# Altium PCB AT89S52单片机入门与提高_粗.PcbDoc (part 5 of 5)
Units mm, origin at the board's own origin, x right, y up, seen from the top; angles counter-clockwise.
Board outline 152.4 x 101.6 mm, 2 copper layers (Top Layer, Bottom Layer); 111 components, 112 nets, 451 pads, 42 vias.
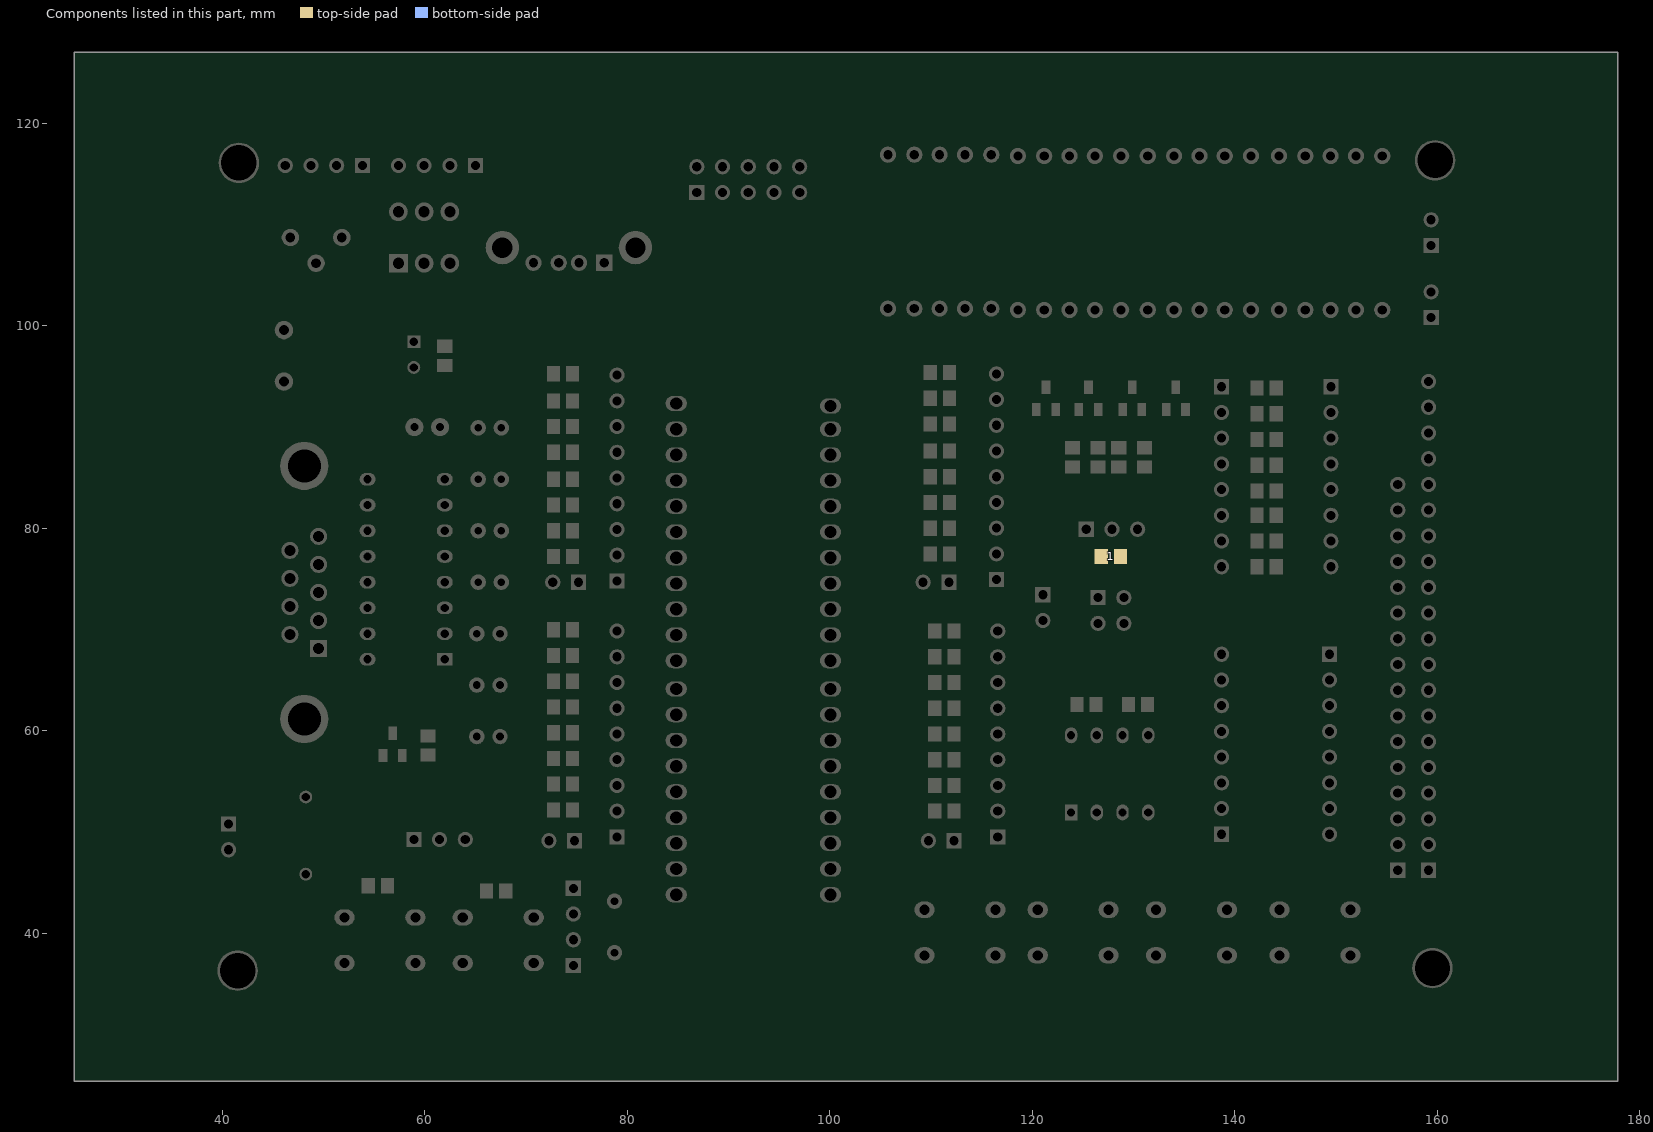
[diagram p5: the components of this part, seen from the top]

## Silkscreen, mask and mechanical layers (free items; w line width, h text height)
Top Overlay:
  text "S52/AVR" at 88.646,103.759 h1.02
  text "20" at 162.052,93.599 h1.02 r90
  text "GND" at 40.386,91.694 h1.02 r90
  text "DATE" at 126.111,81.534 h1.02
  text "15" at 162.052,80.899 h1.02 r90
  text "VCC" at 120.777,79.502 h1.02
  text "GND" at 131.953,79.375 h1.02
  text "P0.7" at 137.414,73.025 h1.52
  text "P1.7" at 147.32,73.025 h1.52
  text "1" at 124.46,72.771 h1.02
  text "2" at 130.683,72.644 h1.02
  text "4" at 130.683,70.104 h1.02
  text "3" at 124.206,69.977 h1.02
  text "P2.7" at 137.414,69.215 h1.52
  text "PSEN" at 119.253,68.199 h1.02
  text "10" at 162.052,68.199 h1.02 r90
  text "5" at 162.052,55.88 h1.02 r90
  text "S52" at 56.896,51.181 h1.02
  text "AVR" at 63.754,51.181 h1.02
  text "P3.7" at 147.32,46.609 h1.52
  text "1" at 161.925,45.974 h1.02 r90
Mechanical 1:
  lines w0.254: 38.354,35.179 40.386,33.147 ; 160.782,119.634 162.814,117.602
  lines w0.654: 161.036,33.147 40.132,33.147 38.227,35.052 38.227,117.729 40.132,119.634 161.163,119.634 ; 161.036,119.634 162.941,117.729 162.941,35.179 ; 161.163,33.274 162.941,35.052

## Text inside footprints (layer, text, board x,y; h text height)
Download: Top Overlay "2" at 84.328,115.189 h1.27; Top Overlay "1" at 84.836,112.649 h1.27; Top Overlay "9" at 98.552,112.649 h1.27; Top Overlay "10" at 98.552,115.189 h1.27
J61: Top Overlay "1" at 52.983,67.87 h1.5 r90; Top Overlay "5" at 52.983,78.7 h1.5 r90; Top Overlay "9" at 43.583,77.315 h1.5 r90; Top Overlay "6" at 43.583,69.005 h1.5 r90